# EAGLE board Skripsi_layout v10 (EAGLE 9.7.0)
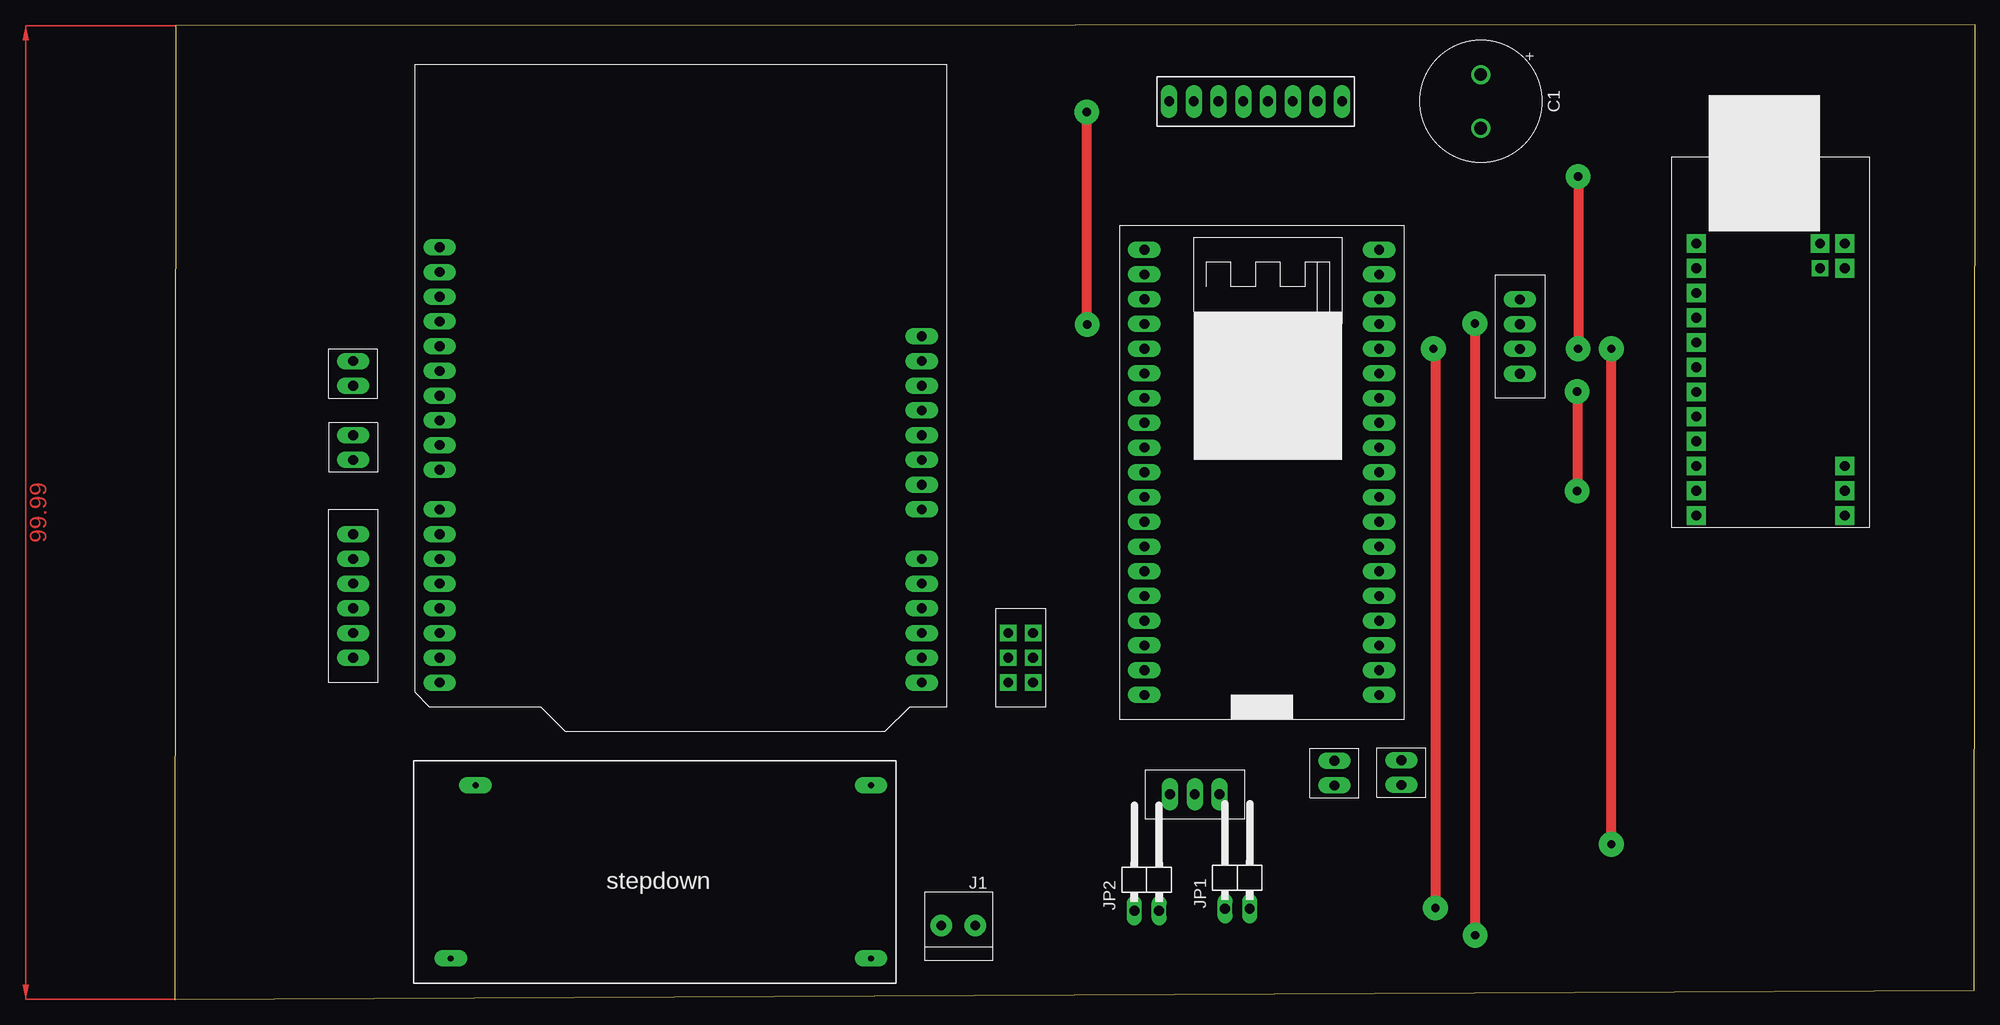
[diagram p0: board, top side]
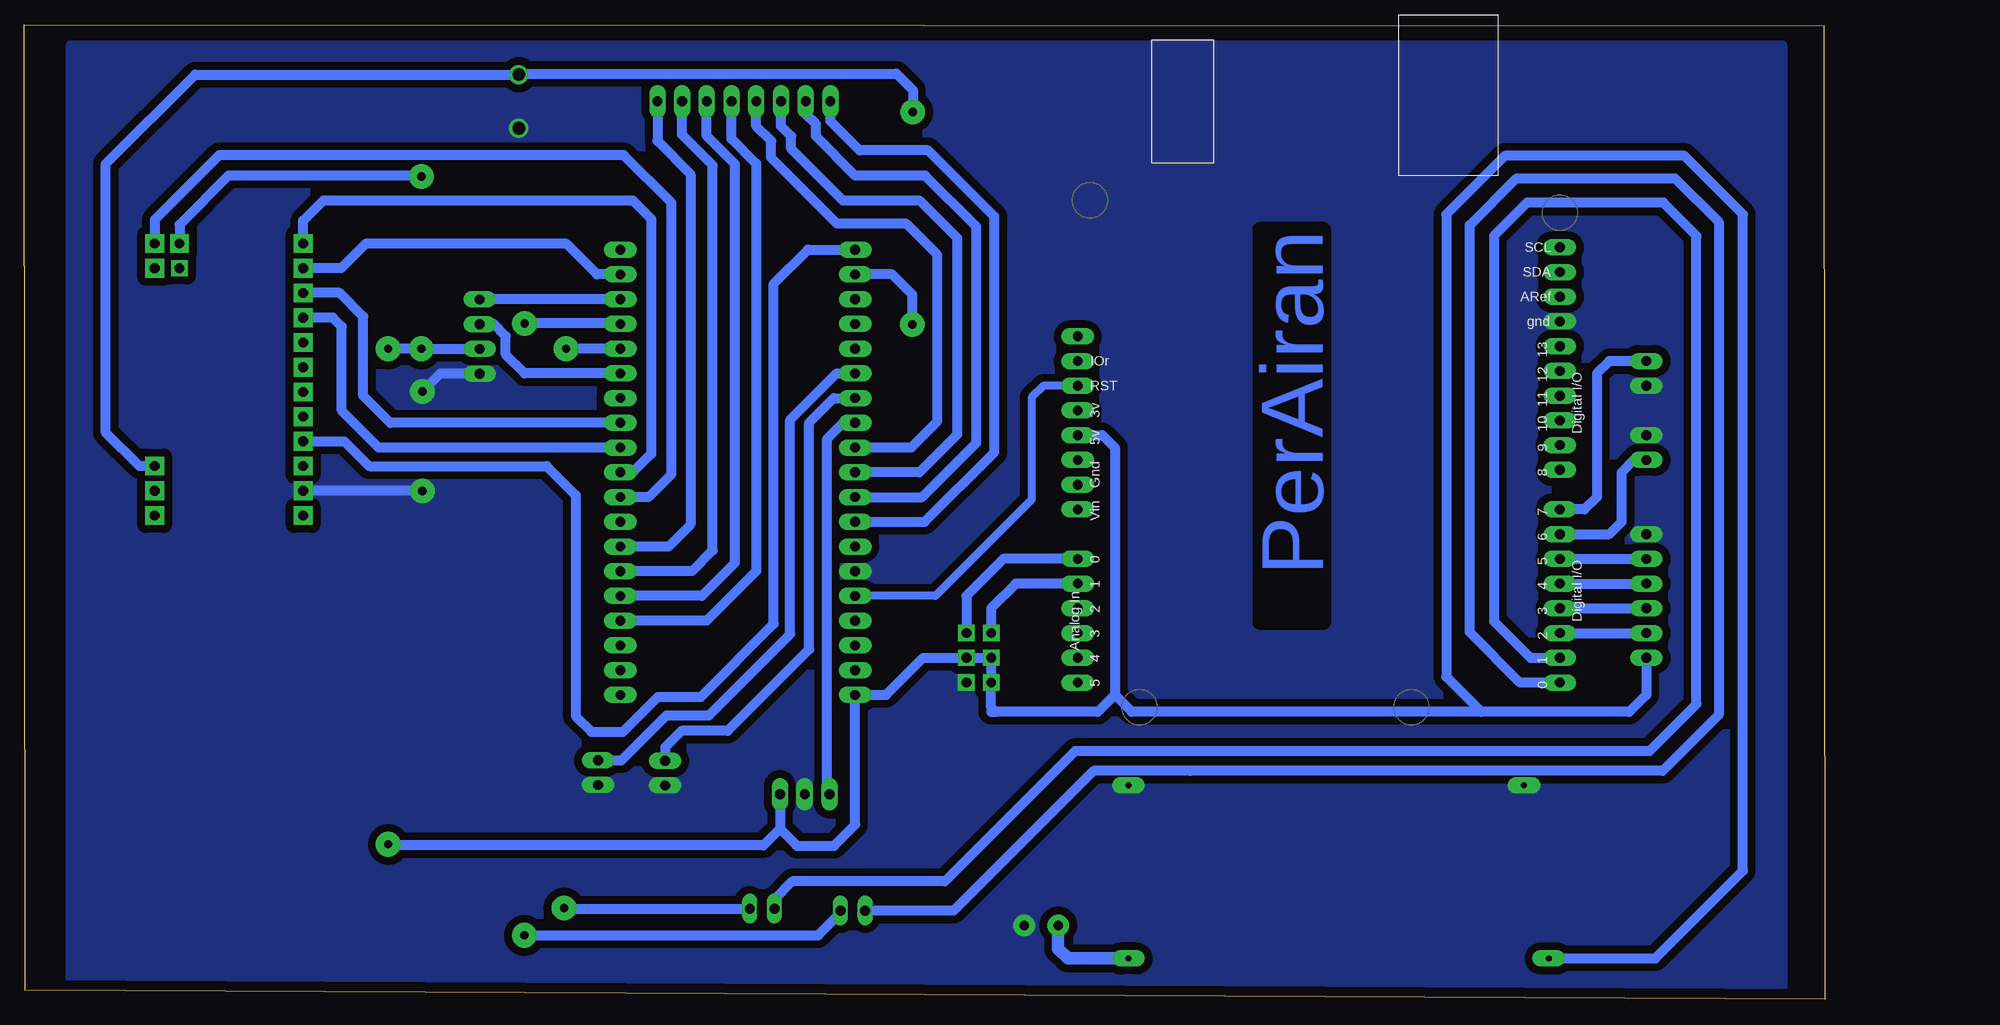
[diagram p1: board, bottom side, seen from below]

Size 184.98 x 100.09 mm. Coordinates in mm from the lower left corner, seen from the top.
Outline: 0,0 184.88,0.9 184.98,100.09 0.1,99.99 0,0
Copper layers (1*16): Top 0.035mm / dielectric 1.5mm / Bottom 0.035mm
Design rules "default *": minimum track width 6mil, minimum drill 0.35mm, track to track 6mil, track to pad 6mil, pad to pad 6mil, via to via 6mil, smd to smd 6mil, copper to edge 40mil, drill to drill 6mil, minimum pad ring 10mil, minimum via ring 8mil, stop-mask expansion 4mil, vias tented up to drill 0mil, thermal gap 10mil

## Footprints (pad centres in the part's own frame; a part is rotated, then mirrored left to right if it is on the bottom)
CAPPRD550W110D1250H2500B = drill 1.3 pad 1.95: 1 -2.75,0; 2 2.75,0
1X2-3.5MM = drill 1 pad 2.184: 1 1.8,0; 2 -1.7,0
1X02/90 = drill 1.016 long: 1 -1.27,-3.81; 2 1.27,-3.81
ARDUINO_UNO = drill 1 pad 1.676 long: 3V -35.56,2.54; 5V -38.1,2.54; A0 -50.8,2.54; A1 -53.34,2.54; A2 -55.88,2.54; A3 -58.42,2.54; A4 -60.96,2.54; A5 -63.5,2.54; AREF -23.876,52.07; D0 -63.5,52.07; D1 -60.96,52.07; D2 -58.42,52.07; D3 -55.88,52.07; D4 -53.34,52.07; D5 -50.8,52.07; D6 -48.26,52.07; D7 -45.72,52.07; D8 -41.656,52.07; D9 -39.116,52.07; D10 -36.576,52.07; D11 -34.036,52.07; D12 -31.496,52.07; D13 -28.956,52.07; GND -26.416,52.07; GND1 -43.18,2.54; GND2 -40.64,2.54; IOREF -30.48,2.54; RESERVED -27.94,2.54; RESET -33.02,2.54; SCL -18.796,52.07; SDA -21.336,52.07; VIN -45.72,2.54
ESP32_NEW = drill 1 pad 1.676 long: 0 26.67,15.24; 2 26.67,12.7; 3V3 2.54,48.26; 4 26.67,17.78; 5V 2.54,2.54; 12 2.54,17.78; 13 2.54,12.7; 14 2.54,20.32; 15 26.67,10.16; 16 26.67,20.32; 17 26.67,22.86; 25 2.54,27.94; 26 2.54,25.4; 27 2.54,22.86; 32 2.54,33.02; 33 2.54,30.48; 34 2.54,38.1; 35 2.54,35.56; CLK 26.67,2.54; CMD 2.54,5.08; EN 2.54,45.72; GND 2.54,15.24; GND1 26.67,48.26; GND2 26.67,33.02; MISO 26.67,30.48; MOSI 26.67,45.72; RX 26.67,38.1; SCK 26.67,27.94; SCL 26.67,43.18; SD0 26.67,5.08; SD1 26.67,7.62; SD2 2.54,10.16; SD3 2.54,7.62; SDA 26.67,35.56; SN 2.54,40.64; SP 2.54,43.18; SS 26.67,25.4; TX 26.67,40.64
USB_HOST = drill 1 pad 1.93 square: 3V3 29.21,2.54; GND 34.29,2.54; INT 8.89,17.78; MISO 13.97,2.54; MOSI 11.43,2.54; P$4 19.05,2.54; P$5 21.59,2.54; P$6 24.13,2.54; P$7 26.67,2.54; P$9 31.75,2.54; P$11 36.83,2.54; P$19 11.43,17.78; P$28 34.29,17.78; P$29 36.83,17.78; RST 31.75,17.78; SCK 16.51,2.54; SS 8.89,2.54; VBUS 8.89,15.24 | drill 1 pad 1.676 square: P$14 11.43,15.24
LCD_I2C = drill 1 pad 1.676 long: GND -2.54,10.16; SCL -2.54,2.54; SDA -2.54,5.08; VCC -2.54,7.62
KEYPAD_4X4 = drill 1 pad 1.676 long: C1 -10.16,3.81; C2 -12.7,3.81; C3 -15.24,3.81; C4 -17.78,3.81; R1 0,3.81; R2 -2.54,3.81; R3 -5.08,3.81; R4 -7.62,3.81
IR_SENSOR = drill 1 pad 1.676 long: GND -5.08,2.54; OUT -7.62,2.54; VCC -2.54,2.54
SWICHLIMITER = drill 1 pad 1.676 long: COM -3.81,2.54; NO -1.27,2.54
RELAY_4CHANNEL = drill 1 pad 1.676 long: GND -15.24,2.54; IN1 -12.7,2.54; IN2 -10.16,2.54; IN3 -7.62,2.54; IN4 -5.08,2.54; VCC -2.54,2.54
MOTOR_DRIVER_BTS7960 = drill 1 pad 1.676 square: GND -2.54,3.81; LEN -5.08,3.81; LPWM -7.62,3.81; REN -5.08,1.27; RPWM -7.62,1.27; VCC -2.54,1.27
XL4005E1 = drill 0.6 pad 1.676 long: IN+ 2.54,20.32; IN- 2.54,2.54; OUT- 43.18,2.54; OUTT+ 45.72,20.32

## Placement (x,y rotation side)
C1  [CAPPRD550W110D1250H2500B]  134.18,92.2 270 top
J1  1X2-3.5MM  [1X2-3.5MM]  80.47,7.58 0 top
JP1  PINHD-1X2/90  [1X02/90]  109.18,13.11 0 top
JP2  PINHD-1X2/90  [1X02/90]  99.86,12.91 0 top
U$1  ARDUINO_UNO  [ARDUINO_UNO]  79.31,96.02 90 top
U$2  ESP32_NEW  [ESP32_NEW]  97.09,28.71 0 top
U$3  USB_HOST  [USB_HOST]  153.8,86.5 270 top
U$4  LCD_I2C  [LCD_I2C]  135.67,74.4 180 top
U$5  KEYPAD_4X4  [KEYPAD_4X4]  119.95,88.4 0 top
U$6  IR_SENSOR  [IR_SENSOR]  109.89,18.5 0 top
U$7  SWITCHLIMITER  [SWICHLIMITER]  128.57,25.81 90 top
U$8  SWITCHLIMITER  [SWICHLIMITER]  121.69,25.76 90 top
U$9  RELAY_4CHANNEL  [RELAY_4CHANNEL]  15.81,32.52 270 top
U$10  MOTOR_DRIVER_BTS7960  [MOTOR_DRIVER_BTS7960]  84.39,29.98 270 top
U$11  SWITCHLIMITER  [SWICHLIMITER]  20.89,66.81 90 top
U$12  SWITCHLIMITER  [SWICHLIMITER]  15.81,54.11 270 top
U$13  XL4005E1  [XL4005E1]  74.1,24.5 180 top

## Library data of the parts
C1 = Capacitor; CATEGORY: Capacitor
J1 = adafruit
JP1 JP2 = Connector; CATEGORY: CONNECTOR; SUB-CATEGORY: PIN-HEADER
U$1-U$3 U$5 U$13 = FusionLocal
U$4 U$6-U$12 = LocalLib

## Nets
3V: U$1.3V
3V3: U$2.3V3 U$3.3V3
5V: U$1.5V U$2.5V U$3.VBUS U$4.VCC U$6.VCC U$9.VCC U$10.LEN U$10.REN U$10.VCC U$13.OUTT+
GND: C1.2 J1.1 U$1.GND U$2.GND U$3.GND U$4.GND U$6.GND U$7.COM U$8.COM U$9.GND U$10.GND U$11.COM U$12.COM U$13.IN- U$13.OUT-
GND1: U$1.GND1
GND2: U$1.GND2
N$1: U$2.4 U$5.R1
N$2: U$2.17 U$3.INT
N$3: C1.1 U$2.EN U$3.RST
N$4: U$2.SS U$3.SS
N$5: U$2.SCK U$3.SCK
N$6: U$2.MISO U$3.MISO
N$7: U$2.MOSI U$3.MOSI
N$8: U$2.0 U$5.R2
N$9: U$2.2 U$5.R3
N$10: U$2.15 U$5.R4
N$11: U$2.25 U$5.C1
N$12: U$1.D2 U$9.IN4
N$13: U$1.D3 U$9.IN3
N$14: U$2.26 U$5.C2
N$15: U$2.27 U$5.C3
N$16: U$2.14 U$5.C4
N$17: U$1.D4 U$9.IN2
N$18: U$2.32 U$8.NO
N$19: U$2.33 U$6.OUT
N$20: U$2.35 U$7.NO
N$21: U$1.D5 U$9.IN1
N$22: U$2.GND2
N$23: U$1.D6 U$12.NO
N$24: U$1.A0 U$10.LPWM
N$25: U$1.A1 U$10.RPWM
N$26: U$1.D7 U$11.NO
N$27: J1.2 U$13.IN+
N$28: U$1.RESET U$2.13
RX: JP1.2 U$2.RX
RXA: JP2.1 U$1.D0
SCL: U$2.SCL U$4.SCL
SDA: U$2.SDA U$4.SDA
TX: JP2.2 U$2.TX
TXA: JP1.1 U$1.D1
VIN: U$1.VIN

## Tracks (layer width: path | path; a pad name or v marks a point on that pad's centre or on a via)
3V3
  Bottom 1.016: U$2.3V3 104.48,76.97 107.99,73.47 107.99,38.54 115.48,31.05 119.9,31.05 123.48,27.46 126.72,27.46 128.34,29.08 128.34,51.77 131.32,54.76 149.56,54.76 152.1,57.3 U$3.3V3
5V  (via drill 0.85 pad 2.54)
  Top 1.016: v144.2,84.5 v144.2,66.8 | v147.6,15.9 v147.6,66.8
  Bottom 1.016: U$1.5V 74.23,57.92 72.96,56.65 72.96,31.25 | 72.96,31.25 74.7,29.51 85.19,29.51 | 85.19,29.51 85.66,29.98 U$10.VCC U$10.REN U$10.LEN 92.64,35.06 96.45,31.25 U$2.5V 99.63,17.91 101.79,15.76 105.6,15.76 107.35,17.51 | U$9.VCC 18.35,31.25 20.1,29.5 35.3,29.5 | 35.3,29.5 71.21,29.5 72.96,31.25 | U$3.VBUS 169.04,79.56 164,84.6 144.3,84.6 v144.2,84.5 | U$4.VCC 138.23,66.8 v144.2,66.8 v147.6,66.8 | U$6.VCC 107.35,17.51 | 107.35,17.51 109.06,15.8 147.5,15.8 v147.6,15.9 | 85.66,29.51 85.19,29.51 | U$13.OUTT+ 17.42,4.18 8.42,13.18 8.42,80.6 14.42,86.6 32.9,86.6 38.9,80.6 38.9,33.1 35.3,29.5
GND  (via drill 0.85 pad 2.54)
  Top 1.016: v144.1,62.4 v144.1,52.2
  Bottom 1.016: U$4.GND 142.25,64.25 v144.1,62.4 | v144.1,52.2 U$3.GND
  pour Bottom (isolate 0.813, no thermals): 4.41,1.01 180.19,1.01 180.19,97.99 4.41,97.99
N$1
  Bottom 1.016: U$2.4 118.81,46.49 116.55,48.75 116.55,84.74 119.95,88.15 U$5.R1
N$2
  Bottom 1.016: U$2.17 120.86,51.57 118.5,53.93 118.5,81.8 123.4,86.69 164.94,86.69 171.58,80.05 U$3.INT
N$3  (via drill 0.85 pad 2.54)
  Top 1.016: v93.7,91.1 93.7,69.35 v93.75,69.3
  Bottom 1.016: v93.75,69.3 93.75,72.35 95.83,74.43 U$2.EN | U$3.RST 173.15,54.75 176.6,58.2 176.6,85.8 167.45,94.95 C1.1 134.07,95.07 95.4,95.07 93.7,93.37 v93.7,91.1
N$4
  Bottom 1.016: U$2.SS 122.49,54.11 120.58,56.02 120.58,80.15 122.49,82.05 154.25,82.05 156.34,79.96 U$3.SS
N$5
  Bottom 1.016: U$2.SCK 148.59,56.65 152.38,60.44 152.38,69.06 153.3,69.99 U$3.SCK
N$6
  Bottom 1.016: U$2.MISO 147.4,59.19 150.16,61.96 150.16,70.11 152.59,72.53 U$3.MISO
N$7
  Bottom 1.016: U$2.MOSI 126.15,74.43 129.3,77.58 149.92,77.58 152.43,75.07 U$3.MOSI
N$8
  Bottom 1.016: U$2.0 116.39,43.95 114.26,46.08 114.26,85.63 117.41,88.78 U$5.R2
N$9
  Bottom 1.016: U$2.2 115.38,41.41 112,44.79 112,85.79 114.87,88.66 U$5.R3
N$10
  Bottom 1.016: U$2.15 114.87,38.87 109.79,43.95 109.79,85.81 112.33,88.35 U$5.R4
N$11
  Bottom 1.016: U$2.25 93.89,56.65 91.22,59.32 91.22,76.49 94.42,79.69 101.54,79.69 108.27,86.42 108.27,88.15 109.79,89.67 U$5.C1
N$12
  Bottom 1.016: U$1.D2 U$9.IN4
N$13
  Bottom 1.016: U$1.D3 U$9.IN3
N$14
  Bottom 1.016: U$2.26 93.02,54.11 89.15,57.98 89.15,78.18 93.02,82.05 100.9,82.05 106.21,87.36 106.21,88.63 107.25,89.67 U$5.C2
N$15
  Bottom 1.016: U$2.27 92.75,51.57 87.18,57.14 87.18,79.32 92.45,84.59 99.63,84.59 103.67,88.63 103.67,89.9 104.71,90.94 U$5.C3
N$16
  Bottom 1.016: U$2.14 92.48,49.03 85.31,56.2 85.31,80.36 92.13,87.18 99.17,87.18 102.17,90.18 U$5.C4
N$17
  Bottom 1.016: U$1.D4 U$9.IN2
N$18
  Bottom 1.016: U$8.NO 119.16,25.9 117.49,27.57 112.71,27.57 104.35,35.92 104.35,59.21 101.84,61.73 U$2.32
N$19
  Bottom 1.016: U$6.OUT 102.5,21.27 102.5,57.56 100.88,59.19 U$2.33
N$20
  Bottom 1.016: U$2.35 101.53,64.27 106.31,59.49 106.31,37.5 114.65,29.16 119.02,29.16 123.64,24.54 U$7.NO
N$21
  Bottom 1.016: U$1.D5 U$9.IN1
N$23
  Bottom 1.016: U$12.NO 19.62,55.38 20.89,54.11 20.89,49.03 22.16,47.76 U$1.D6
N$24
  Bottom 1.016: U$10.LPWM 88.2,41.41 84.39,45.22 U$1.A0
N$25
  Bottom 1.016: U$10.RPWM 85.66,40.14 83.12,42.68 U$1.A1
N$26
  Bottom 1.016: U$11.NO 22.16,65.54 23.43,64.27 23.43,51.57 24.7,50.3 U$1.D7
N$27
  Bottom 1.27: J1.2 78.77,5.17 77.78,4.18 U$13.IN+
N$28
  Bottom 0.813: U$1.RESET 80.3,63 81.5,61.8 81.5,51.3 91.39,41.41 U$2.13
RX  (via drill 0.85 pad 2.54)
  Top 1.016: v129.53,9.37 129.53,66.6 v129.32,66.81
  Bottom 1.016: U$2.RX v129.32,66.81 | v129.53,9.37 129.45,9.3 JP1.2
RXA
  Bottom 1.016: JP2.1 89.5,9.1 75.14,23.46 65.2,23.46 16.66,23.46 10.92,29.2 10.92,79.82 15.4,84.3 31.7,84.3 36.5,79.5 36.5,37.7 31.32,32.52 U$1.D0
SCL
  Bottom 1.016: U$2.SCL 138.19,71.89 U$4.SCL
SDA
  Bottom 1.016: U$2.SDA 133.59,64.27 135.52,66.2 135.52,68.11 136.76,69.35 138.19,69.35 U$4.SDA
TX  (via drill 0.85 pad 2.54)
  Top 1.016: v133.62,6.56 133.62,69.38 v133.59,69.4
  Bottom 1.016: v133.59,69.4 123.81,69.4 U$2.TX | v133.62,6.56 103.44,6.56 101.13,8.87 JP2.2
TXA
  Bottom 1.016: 107.91,10.1 JP1.1 107.91,10.28 106.1,12.09 90.41,12.09 77,25.5 18,25.5 13.2,30.3 13.2,78.4 16.6,81.8 30.6,81.8 34,78.4 34,38.8 30.26,35.06 U$1.D1
(copper drawn outside any net)
  shapes: Top area x1

## Text on the board
Bottom: PerAiran